# Altium PCB WATSH.PcbDoc
Units mm, origin at the board's own origin, x right, y up, seen from the top; angles counter-clockwise.
Board outline 152.4 x 101.6 mm, 2 copper layers (Top Layer, Bottom Layer); 63 components, 44 nets, 185 pads, 0 vias.
Unrouted connection lines stored in the file: 126.
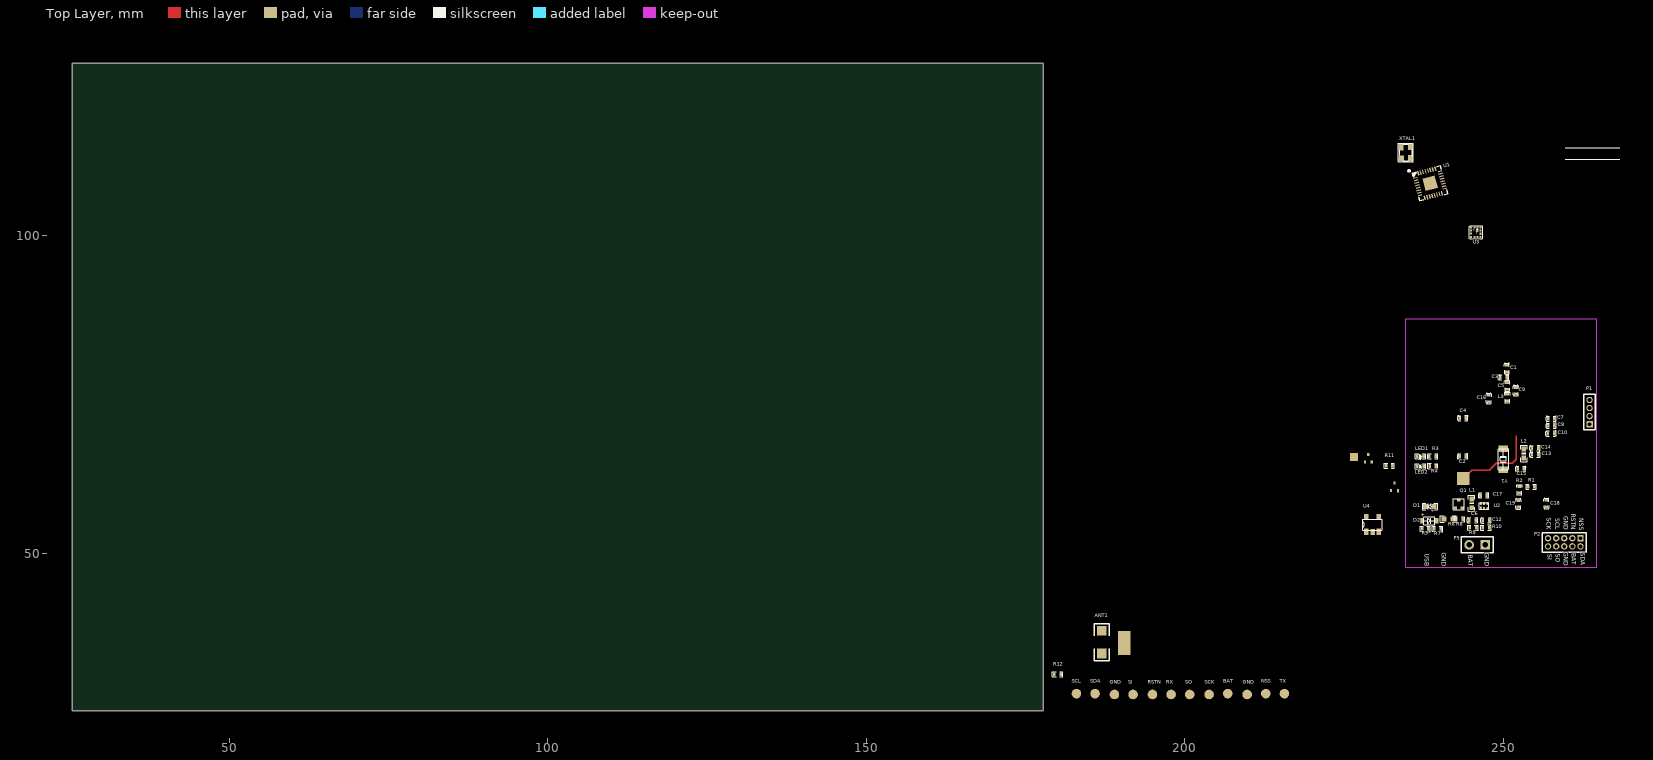
[diagram p0: Top Layer view]
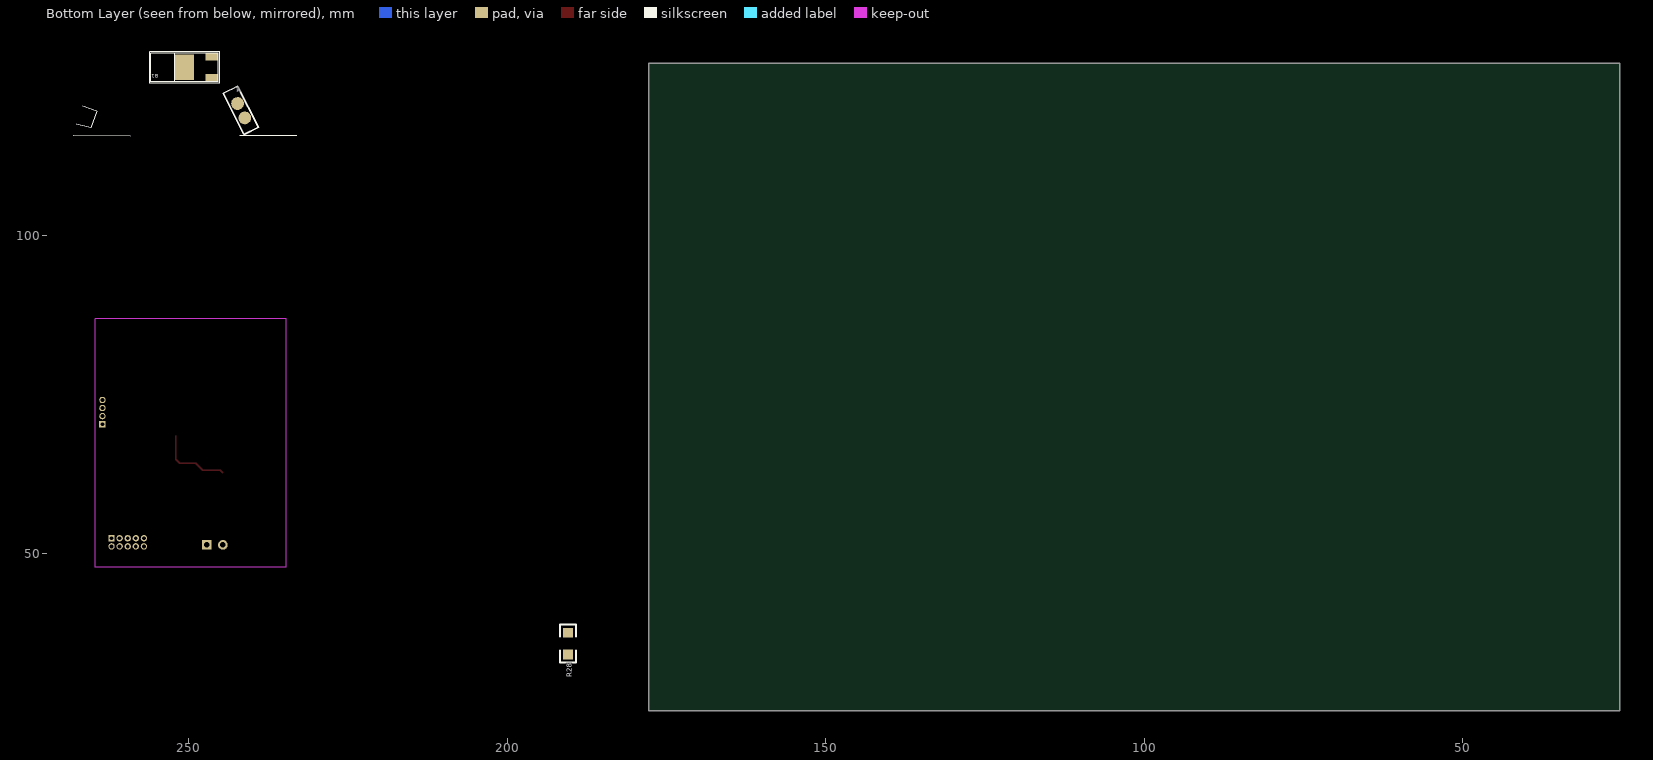
[diagram p1: Bottom Layer view, seen from below]

## Layer stack, top to bottom
Top Layer: signal copper 0.0356
Dielectric: dielectric 0.32, FR-4, Dk 4.8
Bottom Layer: signal copper 0.0356

## Board outline
25.4,25.4 177.8,25.4 177.8,127 25.4,127

## Design rules (kind name [scope] priority, off if disabled: settings)
Clearance [All] p1: gap=0.15
PolygonConnect [All] p1: connectstyle=Relief reliefconductorwidth=0.254 reliefentries=4 polygonreliefangle="90 Angle"
RoutingVias [All] p1: holewidth=0.3 width=0.5 viastyle="Through Hole" minholewidth=0.3 minwidth=0.5 maxholewidth=0.3 maxwidth=0.5
SilkscreenOverComponentPads [IsPad] p1: minsilkscreentomaskgap=0.254
SolderMaskExpansion [All] p1: expansion=0.102
Width [All] p1: maxlimit=1 minlimit=0.1 preferedwidth=0.254
27 further rules are at their usual default settings.

## Components (designator, comment, footprint, x,y, rotation, side; value= is the part's Value field where it differs from the comment)
ANT1 "ANT" 1206#1 186.958,36.146 r90 top
B1 "Motor" MODER 250.66,126.335 r0 bottom
BAT "测试点" TEXT_POINT 206.756,28.067 r0 top
C1 "2.2PF" 0402_C 250.538,79.12 r90 top
C2 "15PF" 0402_C 243.594,65.308 r180 top
C3 "1PF" 0402_C 250.052,77.757 r0 top
C4 "15PF" 0402_C 243.608,71.32 r180 top
C5 "2.2PF" 0402_C 250.56,76.379 r90 top
C6 "2.2uF" 0402_C 245.175,55.286 r0 top
C7 "104" 0402_C 257.49,71.238 r180 top
C8 "104" 0402_C 257.485,70.141 r180 top
C9 "104" 0402_C 251.964,75.608 r270 top
C10 "104" 0402_C 257.505,68.912 r0 top
C12 "104" 0402_C 247.237,55.241 r180 top
C13 "106" 0402_C 254.929,65.575 r180 top
C14 "105" 0402_C 254.944,66.608 r180 top
C15 "104" 0402_C 252.741,63.353 r0 top
C16 "104" 0402_C 247.715,74.374 r270 top
C17 "2.2uF" 0402_C 246.892,59.174 r180 top
C18 "104" 0402_C 256.752,57.921 r90 top
C19 "104" 0402_C 252.344,57.85 r270 top
D1 "1N5819" SOD-323 238.199,55.228 r0 top
D2 "1N5819" SOD-523 238.461,57.428 r180 top
GND "测试点" TEXT_POINT 188.976,27.94 r0 top
GND "测试点" TEXT_POINT 209.804,27.94 r0 top
L1 "2.2uH" 0603p 245.021,57.956 r270 top
L2 "2.2uH" 0603p 253.195,65.76 r90 top
L3 "0R" 0402_R 250.597,74.596 r90 top
LED1 "LED" 0402_LED 236.984,65.337 r180 top
LED2 "LED" 0402_LED 236.984,63.748 r180 top
NSS "测试点" TEXT_POINT 212.725,28.067 r0 top
P1 "UART" MHDR1X4 263.522,70.355 r90 top
P2 "FLASH_LOAD" MHDR2X5 262.091,52.458 r180 top
P4 "BAT" HDR1X2#1 241.166,118.432 r63 bottom
P5 "BAT" HDR1X2#2 247.162,51.423 r180 top
Q1 "SI2300" SOT-523 242.352,57.944 r0 top
R1 "4.7K" 0402_R 254.293,60.56 r180 top
R2 "4.7K" 0402_R 252.517,60.148 r90 top
R3 "1K" 0402_R 238.951,65.33 r0 top
R4 "1K" 0402_R 238.964,63.772 r0 top
R5 "1M" 0402_R 237.678,53.938 r180 top
R6 "10R" 0603_R 241.276,55.441 r0 top
R7 "470K" 0402_R 239.595,53.934 r180 top
R8 "10K" 0402_R 243.061,55.451 r180 top
R9 "1M" 0402_R 245.15,54.129 r180 top
R10 "470K" 0402_R 247.213,54.146 r180 top
R11 "100R" 0402_R 232.142,63.844 r0 top
R12 "1K" 0402_R 180.086,31.115 r0 top
R28 "510K 1%" 1206#2 190.456,34.216 r90 bottom (schematic designator R22)
RSTN "测试点" TEXT_POINT 194.945,27.94 r0 top
RX "测试点" TEXT_POINT 197.866,27.94 r0 top
SCK "测试点" TEXT_POINT 203.835,27.94 r0 top
SCL "测试点" TEXT_POINT 183.007,28.067 r0 top
SDA "测试点" TEXT_POINT 185.928,28.067 r0 top
SI "测试点" TEXT_POINT 191.897,27.94 r0 top
SO "测试点" TEXT_POINT 200.787,27.94 r0 top
TX "RX" TEXT_POINT 215.646,28.067 r0 top
U1 "BK3431Q" QFN32 238.525,108.166 r285 top
U2 "TPS62730" R-PUSON-N6 246.969,57.527 r0 top
U3 "SC7A21" LGA-12-2*2*1 245.681,100.569 r0 top
U4 "XT4051" SOT-23-5L 229.475,54.639 r0 top
XTAL1 "16MHz_10PPM_12p" 晶振2*2.6 234.799,113.011 r270 top
Y1 "32.768K" 晶振1.5*3.2 249.942,64.858 r270 top

## Footprints (in the part's own frame and the unit in brackets; to place one, negate y for a bottom-side part, rotate by r counter-clockwise, add the part's x,y. Pads: shape width x height; smd on the part's side, far side on the other; paste and mask are expansions set on the pad)
0402_C [mm]
  rect 0.4x0.6 smd: 1(-0.518,-0.008) 2(0.485,-0.01)
  silkscreen extent -0.84,-0.41 0.8,0.39
0402_LED [mm]
  rect 0.4x0.6 smd: 1(-0.506,0.012) 2(0.497,0.012)
  silkscreen extent -0.82,-0.42 0.83,0.51
0402_R [mm]
  rect 0.4x0.6 smd: 1(-0.558,0.013) 2(0.435,0.013)
  silkscreen extent -0.86,-0.4 0.75,0.42
0603_R [mil]
  rect 30x30 smd: 1(-24.45,0.72) 2(30.05,0.65)
  silkscreen extent -47,-19 53,21
0603p [mil]
  rect 30x30 smd: 1(-27,0) 2(27.5,-0.06)
  silkscreen extent -50,-20 50,20
1206#1 [mil] "ÌùÆ"
  rect 60x60 smd: 1(-70,0) 2(70,0)
  silkscreen extent -115,-45 115,45, body extent -75,-35 75,35, height 39
1206#2 [mil]
  rect 60x60 smd: 1(0,0) 2(135,0)
  silkscreen extent -50,-50 185,50
HDR1X2#1 [mm] "Connector; Header; 2 Position"
  round 2 smd: 1(0,0) 2(2.54,0)
  silkscreen extent -2.28,-1.27 4.96,1.27
HDR1X2#2 [mm] "Connector; Header; 2 Position"
  rect 1.5x1.5 hole 0.9: 1(0,0)
  round 1.5 hole 0.9: 2(2.54,0)
  silkscreen extent -1.27,-1.27 3.81,1.27
LGA-12-2*2*1 [mm]
  rect 0.32x0.32 smd: 1(-0.757,0.702) 2(-0.76,0.19) 3(-0.758,-0.308) 4(-0.751,-0.826) 5(-0.253,-0.826) 6(0.25,-0.82) 7(0.748,-0.826) 8(0.751,-0.314) 9(0.748,0.19) 10(0.748,0.699) 11(0.25,0.696) 12(-0.251,0.699)
  silkscreen extent -1.04,-1.07 1.04,0.97
MHDR1X4 [mm] "Connector; Header; 4 Position"
  rect 1x1 hole 0.6: 1(0,0)
  round 1 hole 0.6: 2(1.27,0) 3(2.54,0) 4(3.81,0)
  silkscreen extent -0.9,-0.9 4.71,0.9
MHDR2X5 [mm] "Connector; Header; 5x2 Position"
  rect 1x1 hole 0.6: 1(0,0)
  round 1 hole 0.6: 2(0,1.27) 3(1.27,0) 4(1.27,1.27) 5(2.54,0) 6(2.54,1.27) 7(3.81,0) 8(3.81,1.27) 9(5.08,0) 10(5.08,1.27)
  silkscreen extent -0.9,-0.9 5.98,2.17
MODER [mm] "Connector; Header; 2 Posi"
  rect 3x4 smd: 0(-0.027,-0.043)
  rect 2x1.2 smd: 1(-4.31,-1.69) 2(-4.279,1.589)
  silkscreen extent -5.35,-2.26 5.24,2.24
QFN32 [mm]
  oct 0.22x0.7 smd: 1(-1.423,-2.039) 8(1.377,-2.039) 17(1.377,1.961) 24(-1.423,1.961)
  rect 0.22x0.7 smd: 2(-1.023,-2.039) 3(-0.623,-2.039) 4(-0.223,-2.039) 5(0.177,-2.039) 6(0.577,-2.039) 7(0.977,-2.039) 18(0.977,1.961) 19(0.577,1.961) 20(0.177,1.961) 21(-0.223,1.961) 22(-0.623,1.961) 23(-1.023,1.961)
  oct 0.7x0.22 smd: 9(1.977,-1.439) 16(1.977,1.361) 25(-2.023,1.361) 32(-2.023,-1.439)
  rect 0.7x0.22 smd: 10(1.977,-1.039) 11(1.977,-0.639) 12(1.977,-0.239) 13(1.977,0.161) 14(1.977,0.561) 15(1.977,0.961) 26(-2.023,0.961) 27(-2.023,0.561) 28(-2.023,0.161) 29(-2.023,-0.239) 30(-2.023,-0.639) 31(-2.023,-1.039)
  rect 2x2 smd: 33(-0.023,-0.039)
  silkscreen extent -2.91,-2.87 2.26,2.23
R-PUSON-N6 [mm]
  rect 0.3x0.49 smd: 1(-0.49,-0.365) 2(0.003,-0.368) 3(0.508,-0.377) 4(0.508,0.365) 5(0,0.368) 6(-0.487,0.368)
  silkscreen extent -0.74,-0.53 0.76,0.53
SOD-323 [mm]
  rect 0.63x0.83 smd: 1(-0.965,-0.025) 2(1.321,-0.025)
  silkscreen extent -0.69,-0.66 1.02,0.61
SOD-523 [mil]
  rect 30x30 smd: 1(-27.04,0.03) 2(27.46,-0.03)
  silkscreen extent -45,-20 46,20
SOT-23-5L [mm]
  rect 0.7x1 smd: 1(-1.006,-1.184) 2(-0.007,-1.19) 3(0.987,-1.169) 4(0.987,1.15) 5(-1.016,1.15)
  silkscreen extent -1.59,-0.89 1.5,0.81
SOT-523 [mm]
  rect 0.5x0.5 smd: 1(0.075,-0.736) 2(1.177,-0.736) 3(0.645,0.51)
  silkscreen extent -0.25,-1.02 1.52,0.73
TEXT_POINT [mm]
  round 1.5 smd: 1(-0.025,0)
晶振1.5*3.2 [mm]
  rect 1x1.5 smd: 1(-1.643,0.01) 2(1.656,0.016)
  silkscreen extent -1.64,-0.76 1.64,0.8
晶振2*2.6 [mm]
  rect 1x0.8 smd: 1(-0.846,-0.852) 2(0.938,-0.828) 3(0.92,0.6) 4(-0.864,0.612)
  silkscreen extent -1.43,-1.31 1.5,1.05

## Part data
B1: "Motor, General Kind"
C1 C3 C5: library part CAP, "Capacit"
C2 C4: library part CAP, "Capac"
C6 C7 C8 C9 C10 C12 C13 C14 C15 C16 C17 C18 C19: library part Cap, "Capacit"
D1 D2: library part "Diode 1N4001", "1 Amp General Purpose Rectifi"
L1 L2: library part INDUCTOR
L3: library part INDUCT
LED1 LED2: library part L
P1: library part MHDR1X4, "Header, 4-Pin"
P2: library part MHDR2X5, "Header, 5-Pin, Dual row"
P4 P5: library part "Header 2", "Header, 2-Pin"
Q1: library part MOSFET-N, "N-Channel MOSF"
U1: library part BK3
U2: library part TPS6273
U3: library part SC
U4: library part XT
Y1: library part XTAL_1, "Crystal Osc"

## Free pads (board coordinates)
  rect 2x3.7 smd: 2(190.47,36.016)
  rect 1.25x1.25 smd: 4(226.573,65.183)
  rect 0.35x0.5 smd: 4(228.263,64.444) 4(228.798,65.614) 4(229.347,64.428) 4(232.357,59.941) 4(232.891,61.111) 4(233.44,59.925)
  rect 2x2 smd: 8(243.714,61.837)

## Nets (pads, with @x,y where several pads share a name; then routed paths per layer and width w, separated by ;. In a path a pad name is that pad's centre, name@x,y a point inside that pad or via, vN(x,y) a via of type N, cw(c..) or ccw(c..) an arc to the next point about the centre after c; other vN are vias at no path point)
ANT: L3.1 U1.32
BAT: BAT.1 C6.2 P1.1 P2.4 P5.2 R6.1 R9.2 U2.3 U4.3
BAT_TEXT: C12.2 R9.1 R10.2 U1.4
GND: ANT1.2 C2.2 C3.1 C4.1 C6.1 C7.1 C8.1 C9.1 C12.1 C13.1 C14.1 C15.1 C16.1 C17.1 C18.2 C19.2 GND.1 LED1.2 LED2.2 P1.4 P2.5 P2.6 P4.1 P5.1 Q1.2 R7.1 R8.1 R10.1 R11.2 U1.14 U1.33 U2.4 U3.1 U3.4 U3.8 U3.9 U4.2 XTAL1.2 XTAL1.4 Y1.2
INT1: U1.20 U3.5
INT2: U1.21 U3.6
LED1: R3.2 U1.10
LED2: R4.2 U1.11
MOTOR: R12.1 U1.6
NetANT1_1: ANT1.1 C1.2
NetB1_1: B1.1 D2.2 R6.2
NetB1_2: B1.2 D2.1 Q1.3
NetC1_1: C1.1 C3.2 C5.2
NetC2_1: C2.1 U1.3 XTAL1.3
NetC4_2: C4.2 U1.2 XTAL1.1
NetC5_1: C5.1 L3.2
NetC8_2: C8.2 U1.19
NetC10_1: C10.1 U1.17
NetC10_2: C10.2 U1.18
NetD1_1: D1.1 P4.2
NetD1_2: D1.2 U4.4
NetL1_2: L1.2 U2.2
NetL2_2: L2.2 U1.15
NetLED1_1: LED1.1 R3.1
NetLED2_1: LED2.1 R4.1
NetQ1_G: Q1.1 R8.2 R12.2
NetR11_1: R11.1 U4.5
NetU1_9: U1.9 Y1.1
P00/UART1_TX: P1.2 TX.1 U1.23
P01/UART1_RX: P1.3 RX.1 U1.24
P02/I2C_SCL: P2.7 R1.1 SCL.1 U1.25 U3.12
P03/I2C_SDA: P2.2 R2.1 SDA.1 U1.26 U3.2
P04/SPI_SCK: P2.9 SCK.1 U1.27
P05/SPI_SI: P2.10 SI.1 U1.28
P06/SPI_SO: P2.8 SO.1 U1.29
P07/SPI_NSS: NSS.1 P2.1 U1.30
RSTN: P2.3 RSTN.1 U1.8
SW: C7.2 C9.2 C15.2 C16.2 L2.1 U1.1 U1.22 U1.31
TPS_ON: U1.7 U2.5
USB: R5.2
USB_TEXT: R5.1 R7.2 U1.5
VCCBAT: C13.2 C14.2 C17.2 L1.1 R1.2 R2.2 U1.16 U2.6
VCCBATT: C18.1 C19.1 U3.3 U3.7 U3.11
XT4051_CHRG: U1.12 U4.1
pads on no net: B1.0 R28.1 R28.2 U1.13 U2.1 U3.10
copper on no net: | length 11.9
  Top Layer w0.2: 244.642,62.753 244.996,63.106 247.76,63.106 248.876,64.221 251.389,64.221 251.991,64.824 251.991,68.562

## Keep-outs
Keep-Out Layer:
  lines w0.08: 234.696,47.879 264.668,47.879 264.668,86.885 234.696,86.885 234.696,47.879

## Silkscreen, mask and mechanical layers (free items; w line width, h text height)
Top Overlay:
  lines w0.127: 259.732,111.957 268.229,111.957 ; 259.732,113.757 268.229,113.757
  text "RSTN" at 260.381,56.288 h1.2 r270
  text "GND" at 259.227,55.911 h1.2 r270
  text "SCK" at 256.562,55.641 h1.2 r270
  text "SCL" at 257.889,55.576 h1.2 r270
  text "NSS" at 261.687,55.587 h1.2 r270
  text "GND" at 259.237,50.236 h1.2 r270
  text "GND" at 240.053,50.174 h1.2 r270
  text "GND" at 246.845,50.174 h1.2 r270
  text "SDA" at 261.881,50.171 h1.2 r270
  text "BAT" at 260.478,50.084 h1.2 r270
  text "USB" at 237.416,50.041 h1.2 r270
  text "SO" at 257.964,50.031 h1.2 r270
  text "BAT" at 244.259,49.907 h1.2 r270
  text "SI" at 256.691,49.923 h1.2 r270
Bottom Overlay:
  lines w0.127: 232.996,115.608 241.95,115.597 ; 259.152,115.589 268.107,115.6 ; 266.612,120.299 264.432,119.505 265.392,116.872 267.638,117.48 ; 239.088,116.969 241.317,115.837 244.571,122.244 242.342,123.376 239.088,116.969 ; 245.073,123.857 256.073,123.857 256.073,128.857 245.073,128.857 245.073,123.857
Top Solder:
  region: 234.764,86.879 234.764,80.015 251.154,80.015 251.154,86.879
  rectangle: 251.063,81.971 264.684,86.92
Bottom Solder:
  rectangle: 234.674,76.506 264.637,86.983
Mechanical 1:
  lines w0.127: 233.213,116.393 ccw(c250.565,112.9) 264.114,101.511 ; 233.416,117.283 cw(c250.565,112.9) 257.831,129.04 257.336,127.995 258.148,127.603 258.653,128.644 cw(c250.565,112.9) 264.683,102.225 ; 253.589,123.358 cw(c253.589,120.758) 255.907,121.936 ; 253.603,123.307 247.501,123.307 ccw(c247.501,120.707) 245.183,121.884 241.929,115.477 ccw(c247.088,112.857) 241.929,110.237 245.183,103.83 ccw(c247.501,105.007) 247.501,102.407 253.603,102.407 ccw(c253.603,105.007) 255.921,103.83 259.175,110.237 ccw(c254.016,112.857) 259.175,115.477 255.921,121.884 ; 253.615,123.35 247.514,123.35 ccw(c247.514,120.75) 245.195,121.928 241.942,115.52 ccw(c247.101,112.9) 241.942,110.281 245.195,103.873 ccw(c247.514,105.05) 247.514,102.45 253.615,102.45 ccw(c253.615,105.05) 255.934,103.873 259.188,110.281 ccw(c254.029,112.9) 259.188,115.52 255.934,121.928 ; 257.818,128.997 ccw(c250.552,112.857) 233.403,117.239 234.575,116.968 234.375,116.09 233.2,116.349 ccw(c250.552,112.857) 264.102,101.468 263.252,102.156 263.814,102.861 264.671,102.182 ccw(c250.552,112.857) 258.641,128.601
Mechanical 2:
  circle w0.064: c268.229,111.957 r0.032
  circle w0.064: c268.229,113.757 r0.032
  circle w0.064: c235.418,103.742 r0.032

## Text inside footprints (layer, text, board x,y; h text height)
D1: Top Overlay "+" at 237.005,55.635 h1
D2: Top Overlay "+" at 239.106,57.074 h0.8 r180
U3: Top Overlay "Y" at 245.689,99.984 h0.8; Top Overlay "x" at 245.215,100.572 h0.8